# EAGLE board TSMPC (EAGLE 9.3.0)

Size 160 x 100 mm. Coordinates in mm from the lower left corner, seen from the top.
Outline: 0,0 160,0 160,100 0,100 0,0
Copper layers (1*16): Top 0.035mm / dielectric 1.5mm / Bottom 0.035mm
Design rules "default": minimum track width 6mil, minimum drill 0.35mm, track to track 6mil, track to pad 6mil, pad to pad 6mil, via to via 6mil, smd to smd 6mil, copper to edge 40mil, drill to drill 6mil, minimum pad ring 10mil, minimum via ring 8mil, stop-mask expansion 4mil, vias tented up to drill 0mil, thermal gap 10mil

## Footprints (pad centres in the part's own frame; a part is rotated, then mirrored left to right if it is on the bottom)
R0805 = smd 1.3 x 1.5: 1 -0.95,0; 2 0.95,0
BANANA-PRINT = drill 6 pad 9: P$1 0,0

## Placement (x,y rotation side)
35221K0JT  1k  [R0805]  2.54,-3.81 0 top  (outside the outline)
R2  1k  [R0805]  2.54,-8.89 0 top  (outside the outline)
R3  1k  [R0805]  2.54,-13.97 0 top  (outside the outline)
R4  1k  [R0805]  2.54,-19.05 0 top  (outside the outline)
R5  1k  [R0805]  2.54,-24.13 0 top  (outside the outline)
R6  1k  [R0805]  2.54,-29.21 0 top  (outside the outline)
R7  1k  [R0805]  2.54,-34.29 0 top  (outside the outline)
R8  1k  [R0805]  2.54,-39.37 0 top  (outside the outline)
R9  1k  [R0805]  2.54,-44.45 0 top  (outside the outline)
R10  1k  [R0805]  2.54,-49.53 0 top  (outside the outline)
R21  1k  [R0805]  2.54,-107.95 0 top  (outside the outline)
R22  1k  [R0805]  8.89,-107.95 0 top  (outside the outline)
R23  1k  [R0805]  -7.62,-121.92 0 top  (outside the outline)
R24  1k  [R0805]  -1.27,-121.92 0 top  (outside the outline)
R25  1k  [R0805]  5.08,-121.92 0 top  (outside the outline)
R26  1k  [R0805]  -7.62,-128.27 0 top  (outside the outline)
R27  1k  [R0805]  -1.27,-128.27 0 top  (outside the outline)
R28  1k  [R0805]  5.08,-128.27 0 top  (outside the outline)
R29  1k  [R0805]  -7.62,-134.62 0 top  (outside the outline)
R30  1k  [R0805]  -1.27,-134.62 0 top  (outside the outline)
U$1  BANANA-JACK  [BANANA-PRINT]  -5.08,-71.12 0 top  (outside the outline)
U$3  BANANA-JACK  [BANANA-PRINT]  -5.08,-99.06 0 top  (outside the outline)
U$4  BANANA-JACK  [BANANA-PRINT]  -5.08,-113.03 0 top  (outside the outline)

## Library data of the parts
35221K0JT R2-R10 R21-R30 = rcl; SPICEPREFIX: R
U$1 U$3 U$4 = con-banana

## Nets
DIRECT_CHASSIS_GND_MEASURE_POINT: R21.2 U$3.P$1
HV+_MEASURE_POINT: R10.1 U$1.P$1
HV-_MEASURE_POINT: R30.1 U$4.P$1
N$1: 35221K0JT.1 R2.2
N$2: R2.1 R3.2
N$3: R3.1 R4.2
N$4: R4.1 R5.2
N$5: R5.1 R6.2
N$6: R6.1 R7.2
N$7: R7.1 R8.2
N$8: R8.1 R9.2
N$9: R9.1 R10.2
N$21: R21.1 R22.2
N$22: R22.1 R23.2
N$23: R23.1 R24.2
N$24: R24.1 R25.2
N$25: R25.1 R26.2
N$26: R26.1 R27.2
N$27: R27.1 R28.2
N$28: R28.1 R29.2
N$29: R29.1 R30.2
V+: 35221K0JT.2

## Tracks (layer width: path | path; a pad name or v marks a point on that pad's centre or on a via)
DIRECT_CHASSIS_GND_MEASURE_POINT  (1 unrouted)
HV+_MEASURE_POINT  (1 unrouted)
HV-_MEASURE_POINT  (1 unrouted)
N$1  (1 unrouted)
N$2  (1 unrouted)
N$3  (1 unrouted)
N$4  (1 unrouted)
N$5  (1 unrouted)
N$6  (1 unrouted)
N$7  (1 unrouted)
N$8  (1 unrouted)
N$9  (1 unrouted)
N$21  (1 unrouted)
N$22  (1 unrouted)
N$23  (1 unrouted)
N$24  (1 unrouted)
N$25  (1 unrouted)
N$26  (1 unrouted)
N$27  (1 unrouted)
N$28  (1 unrouted)
N$29  (1 unrouted)